# Altium PCB PCB1.PcbDoc
Units mm, origin at the board's own origin, x right, y up, seen from the top; angles counter-clockwise.
Board outline 152.4 x 101.6 mm, 2 copper layers (Top Layer, Bottom Layer); 89 components, 84 nets, 400 pads, 36 vias.
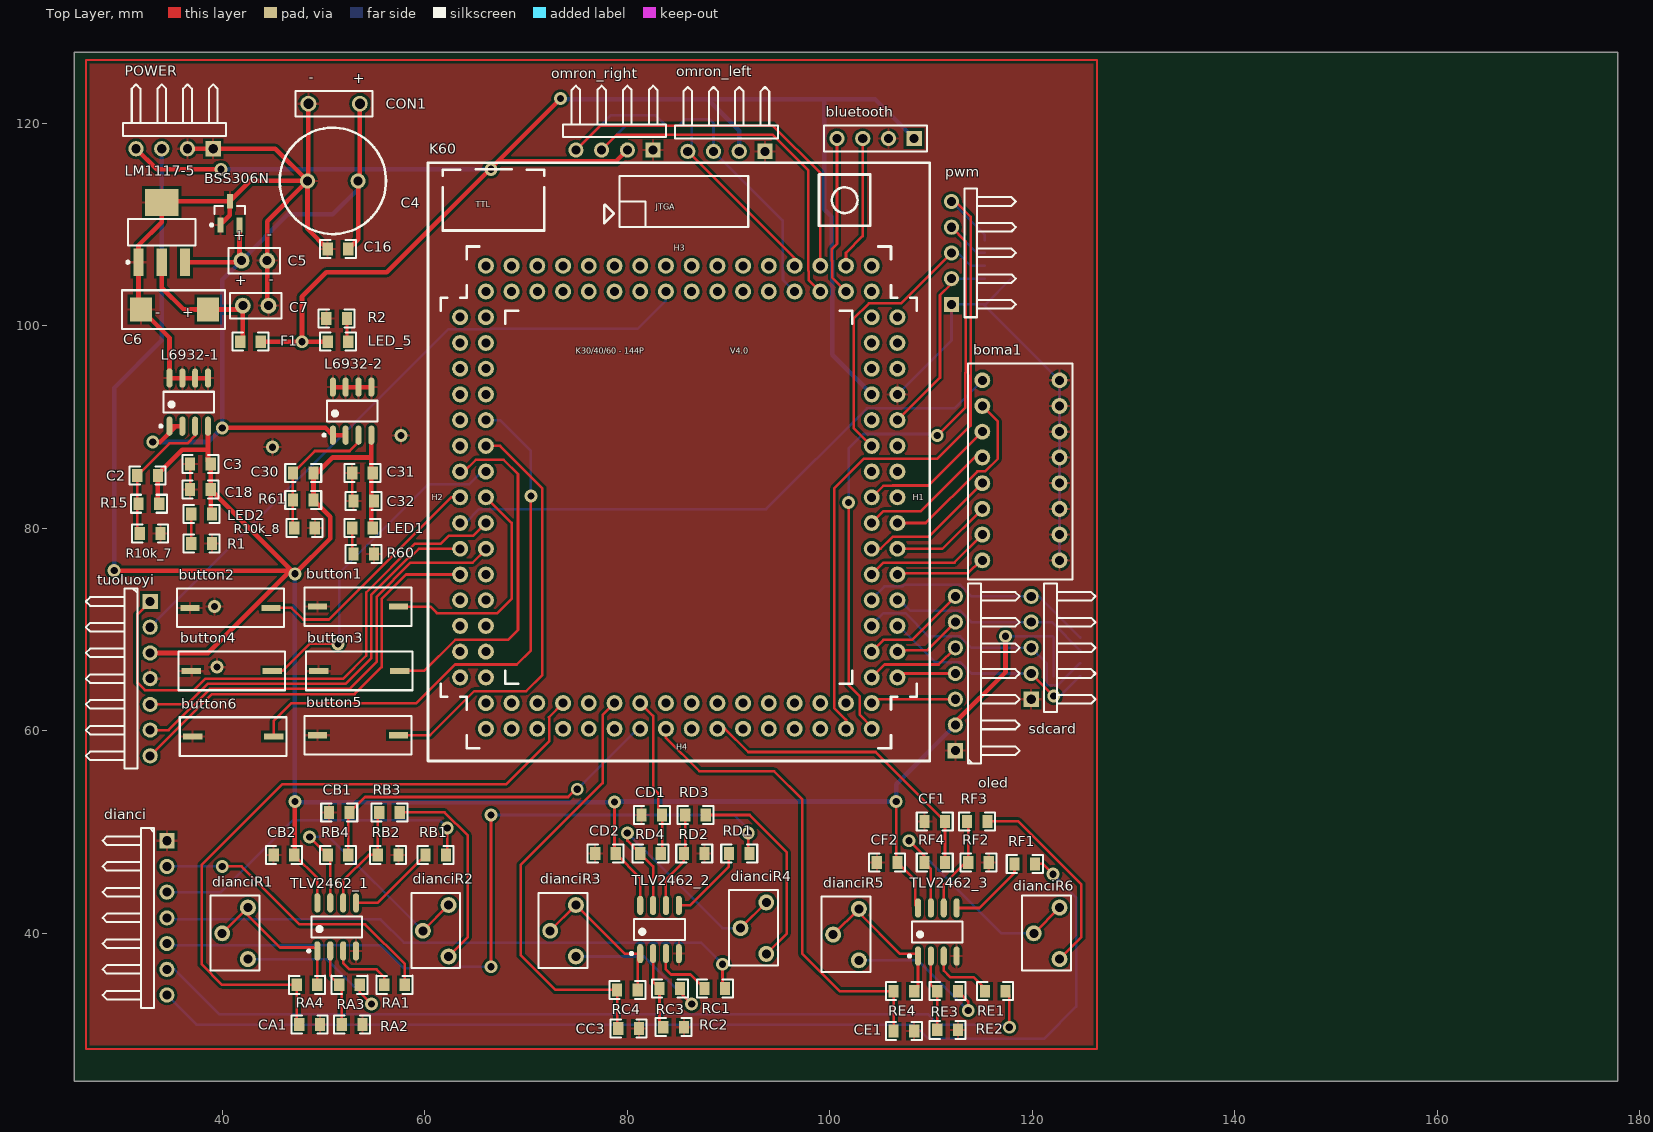
[diagram p0: Top Layer view]
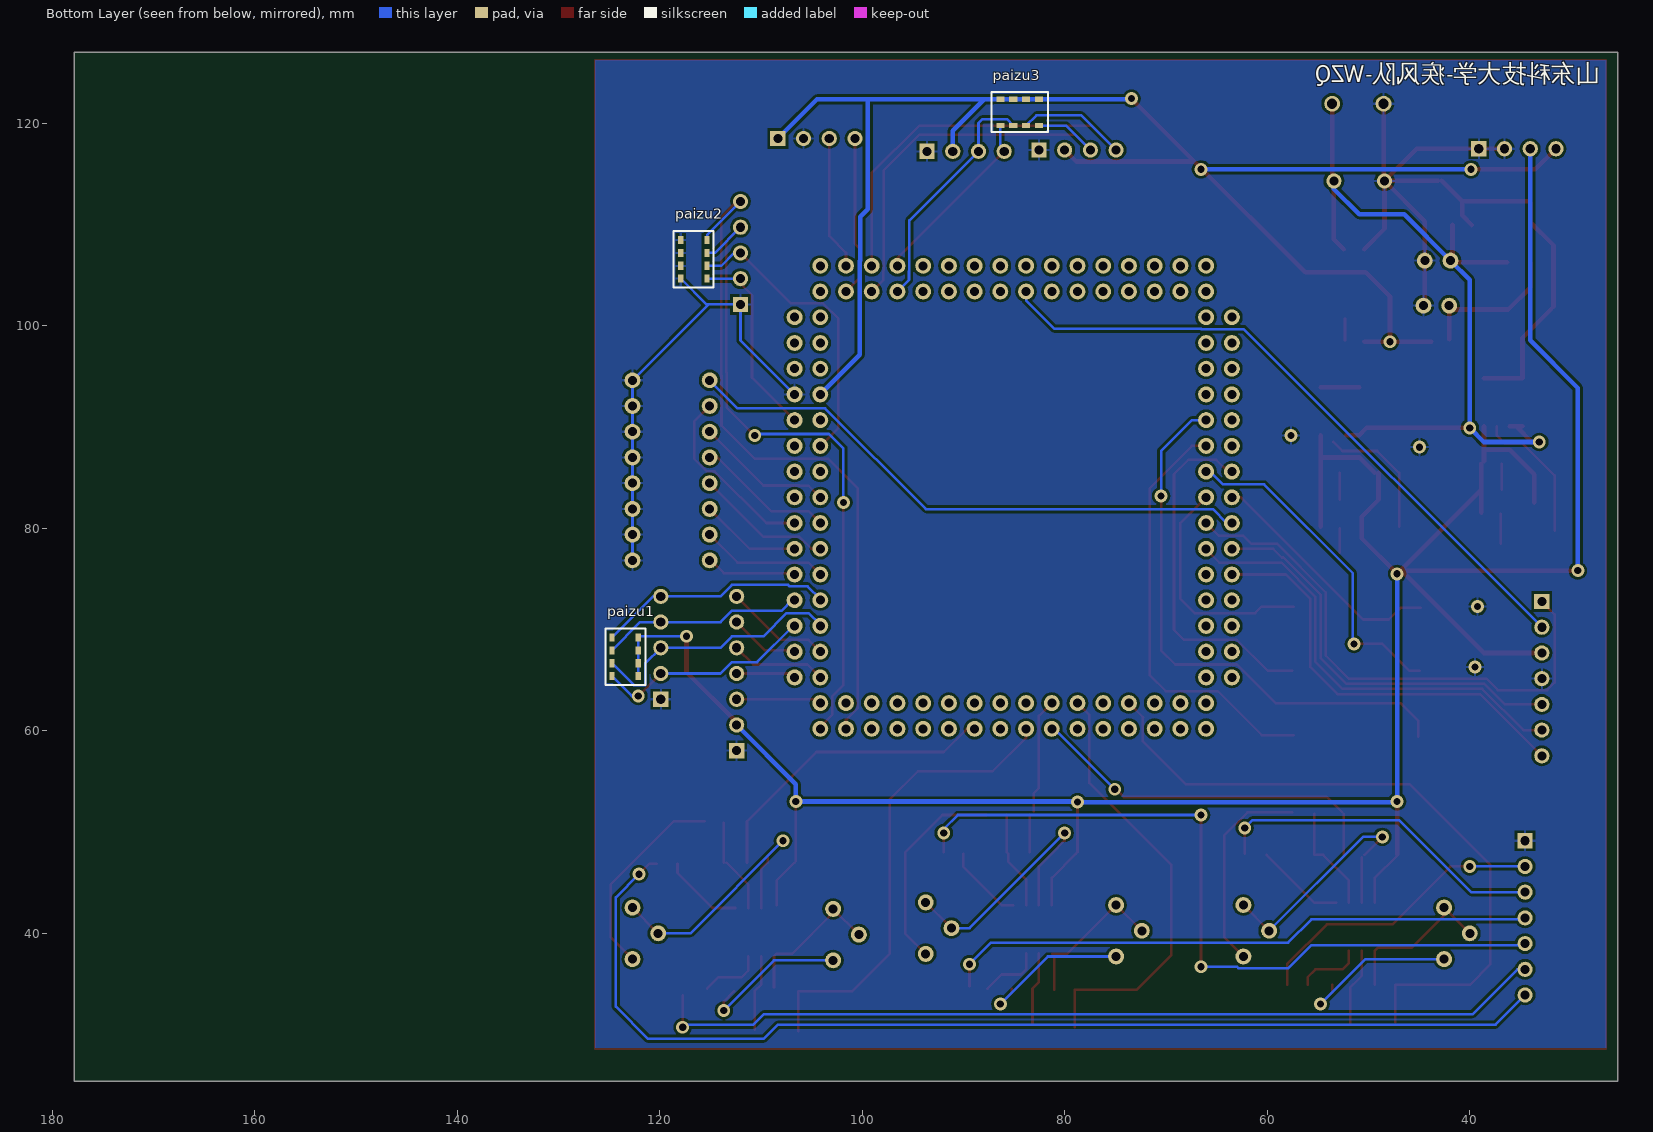
[diagram p1: Bottom Layer view, seen from below]

## Layer stack, top to bottom
Top Layer: signal copper 0.0356
Dielectric: dielectric 0.32, FR-4, Dk 4.8
Bottom Layer: signal copper 0.0356

## Board outline
25.4,25.4 177.8,25.4 177.8,127 25.4,127

## Design rules (kind name [scope] priority, off if disabled: settings)
Clearance [All] p1: gap=0.254
PolygonConnect [All] p1: connectstyle=Relief reliefconductorwidth=0.254 reliefentries=4 polygonreliefangle="90 Angle" airgapwidth=0.254
RoutingVias [All] p1: holewidth=0.711 width=1.27 viastyle="Through Hole" minholewidth=0.711 minwidth=1.27 maxholewidth=0.711 maxwidth=1.27
SolderMaskExpansion [All] p1: expansion=0.102
Width [All] p1: maxlimit=0.254 minlimit=0.254 preferedwidth=0.254
28 further rules are at their usual default settings.

## Components (designator, comment, footprint, x,y, rotation, side; value= is the part's Value field where it differs from the comment)
bluetooth "bluetooth" HDR1X4 108.331,118.491 r180 top
boma1 "boma_button" config_8 115.062,76.835 r90 top
BSS306N "MOSFET-N" SOT-23_M 40.767,111.125 r90 top
button1 "SW-PB" button 57.404,72.263 r180 top
button2 "SW-PB" button 44.831,72.136 r180 top
button3 "SW-PB" button 57.531,65.913 r180 top
button4 "SW-PB" button 44.958,65.913 r180 top
button5 "SW-PB" button 57.404,59.563 r180 top
button6 "SW-PB" button 45.085,59.436 r180 top
C2 "Cap" 0805 32.639,85.217 r0 top
C3 "Cap" 0805 37.846,86.36 r0 top
C4 "Cap Pol1" RB5-10.5 50.927,114.3 r180 top
C5 "Cap Pol1" 钽电容_小 44.45,106.426 r180 top
C6 "Cap Pol1" D7343 32.004,101.6 r0 top
C7 "Cap Pol1" 钽电容_小 44.577,101.981 r180 top
C16 "Cap" 0805 51.435,107.569 r0 top
C18 "Cap" 0805 37.846,83.82 r0 top
C30 "Cap" 0805 48.006,85.471 r0 top
C31 "Cap" 0805 53.848,85.471 r0 top
C32 "Cap" 0805 53.975,82.677 r0 top
CA1 "Cap" 0805 48.641,30.988 r180 top
CB1 "Cap" 0805 51.562,51.943 r0 top
CB2 "Cap" 0805 46.101,47.752 r180 top
CC3 "Cap" 0805 80.137,30.607 r180 top
CD1 "Cap" 0805 82.423,51.689 r0 top
CD2 "Cap" 0805 77.851,47.879 r180 top
CE1 "Cap" 0805 107.315,30.353 r180 top
CF1 "Cap" 0805 110.363,51.054 r0 top
CF2 "Cap" 0805 105.664,46.99 r180 top
CON1 "PowerIn" 接线端子 53.594,121.92 r180 top
dianci "interface_dianci" HDR1X7H 34.544,49.149 r270 top
dianciR1 "R4" 滑动变阻器 40.005,40.005 r90 top
dianciR2 "R4" 滑动变阻器 59.817,40.259 r90 top
dianciR3 "R4" 滑动变阻器 72.39,40.259 r90 top
dianciR4 "R4" 滑动变阻器 91.186,40.513 r90 top
dianciR5 "R4" 滑动变阻器 100.33,39.878 r90 top
dianciR6 "R4" 滑动变阻器 120.142,40.005 r90 top
F1 "Fuse 2" 0805 42.799,98.425 r0 top
K60 "K60" "K60 V4.0最小系统版" 85.09,83.185 r0 top
L6932-1 "L6932" L6932 36.703,92.456 r90 top
L6932-2 "L6932" L6932 52.832,91.567 r90 top
LED1 "LED2" 0805 53.848,80.01 r180 top (schematic designator LED_3.3_1)
LED2 "LED2" 0805 37.973,81.407 r180 top (schematic designator LED_3.3_2)
LED_5 "LED2" 0805 51.435,98.425 r0 top
LM1117-5 "LM1117-5" SOT223_M 34.036,109.22 r90 top
oled "oled" HDR1X7H 112.395,58.039 r90 top
omron_left "omron_encoder" HDR1X4H 93.599,117.221 r180 top
omron_right "omron_encoder" HDR1X4H 82.55,117.348 r180 top
paizu1 "paizu_1206" paizu 124.714,65.405 r90 bottom
paizu2 "paizu_1206" paizu 115.316,108.458 r270 bottom
paizu3 "paizu_1206" paizu 82.55,119.761 r0 bottom
POWER "power" HDR1X4H 39.116,117.475 r180 top
pwm "pwm" HDR1X5H 112.014,102.108 r90 top
R1 "Res2" 0805 37.973,78.486 r180 top
R2 "Res2" 0805 51.308,100.711 r0 top
R10k_7 "Res2" 0805 32.893,79.502 r180 top
R10k_8 "Res2" 0805 48.133,80.01 r180 top
R15 "Res2" 0805 32.766,82.423 r0 top
R60 "Res2" 0805 53.975,77.47 r180 top
R61 "Res2" 0805 48.006,82.804 r0 top
RA1 "Res2" 0805 57.023,34.925 r180 top
RA2 "Res2" 0805 52.832,30.988 r180 top
RA3 "Res2" 0805 52.578,34.925 r0 top
RA4 "Res2" 0805 48.387,34.925 r180 top
RB1 "Res2" 0805 61.087,47.752 r180 top
RB2 "Res2" 0805 56.388,47.752 r180 top
RB3 "Res2" 0805 56.515,51.943 r0 top
RB4 "Res2" 0805 51.435,47.752 r0 top
RC1 "Res2" 0805 88.646,34.544 r180 top
RC2 "Res2" 0805 84.582,30.734 r180 top
RC3 "Res2" 0805 84.201,34.544 r0 top
RC4 "Res2" 0805 80.01,34.417 r180 top
RD1 "Res2" 0805 91.059,47.879 r180 top
RD2 "Res2" 0805 86.614,47.879 r180 top
RD3 "Res2" 0805 86.741,51.689 r0 top
RD4 "Res2" 0805 82.296,47.879 r0 top
RE1 "Res2" 0805 116.332,34.29 r180 top
RE2 "Res2" 0805 111.633,30.48 r180 top
RE3 "Res2" 0805 111.633,34.29 r0 top
RE4 "Res2" 0805 107.315,34.29 r180 top
RF1 "Res2" 0805 119.253,46.863 r180 top
RF2 "Res2" 0805 114.681,46.99 r180 top
RF3 "Res2" 0805 114.554,51.054 r0 top
RF4 "Res2" 0805 110.363,46.99 r0 top
sdcard "interface_sdcard" HDR1X5H 119.888,63.119 r90 top (schematic designator interface_sdcard)
TLV2462_1 "TLV2462" SOP127P600X175-8L 51.308,40.64 r90 top
TLV2462_2 "TLV2462" SOP127P600X175-8L 83.185,40.386 r90 top
TLV2462_3 "TLV2462" SOP127P600X175-8L 110.617,40.132 r90 top
tuoluoyi "Component_sensor_tuoluoyi" HDR1X7H 32.893,72.771 r270 top

## Footprints (in the part's own frame and the unit in brackets; to place one, negate y for a bottom-side part, rotate by r counter-clockwise, add the part's x,y. Pads: shape width x height; smd on the part's side, far side on the other; paste and mask are expansions set on the pad)
0805 [mil]
  rect 40x50 smd: 1(-40,0) 2(40,0)
  silkscreen extent -70,-35 70,35
button [mm]
  rect 1.9x0.6 smd: 1(0,0) 2(8,0)
  silkscreen extent -1.27,-1.91 9.27,1.91
config_8 [mm]
  round 1.575 hole 0.889: 1(0,0) 2(0,-7.62) 3(2.54,0) 4(2.54,-7.62) 5(5.08,0) 6(5.08,-7.62) 7(7.62,0) 8(7.62,-7.62) 9(10.16,0) 10(10.16,-7.62) 11(12.7,0) 12(12.7,-7.62) 13(15.24,0) 14(15.24,-7.62) 15(17.78,0) 16(17.78,-7.62)
  silkscreen extent -1.91,-8.89 19.43,1.4
D7343 [mm]
  rect 2.16x2.41 smd: 1(0,0) 2(6.61,0)
  silkscreen extent -1.91,-1.91 8.25,1.91
HDR1X4 [mm] "Connector; Header; 4 Position"
  rect 1.5x1.5 hole 0.9: 1(0,0)
  round 1.5 hole 0.9: 2(2.54,0) 3(5.08,0) 4(7.62,0)
  silkscreen extent -1.27,-1.27 8.89,1.27
HDR1X4H [mm] "Connector; Header; 4 Position; Right Angle"
  rect 1.5x1.5 hole 0.9: 1(0,0)
  round 1.5 hole 0.9: 2(2.54,0) 3(5.08,0) 4(7.62,0)
  silkscreen extent -1.27,-6.35 8.89,-1.27
HDR1X5H [mm] "Connector; Header; 5 Position; Right Angle"
  rect 1.5x1.5 hole 0.9: 1(0,0)
  round 1.5 hole 0.9: 2(2.54,0) 3(5.08,0) 4(7.62,0) 5(10.16,0)
  silkscreen extent -1.27,-6.35 11.43,-1.27
HDR1X7H [mm] "Connector; Header; 7 Position; Right Angle"
  rect 1.5x1.5 hole 0.9: 1(0,0)
  round 1.5 hole 0.9: 2(2.54,0) 3(5.08,0) 4(7.62,0) 5(10.16,0) 6(12.7,0) 7(15.24,0)
  silkscreen extent -1.27,-6.35 16.51,-1.27
"K60 V4.0最小系统版" [mil]
  round 62 hole 35: 101(850,-705) 102(750,-705) 103(850,-605) 104(750,-605) 105(850,-505) 106(750,-505) 107(850,-405) 108(750,-405) 109(850,-305) 110(750,-305) 111(850,-205) 112(750,-205) 113(850,-105) 114(750,-105) 115(850,-5) 116(750,-5) 117(850,95) 118(750,95) 119(850,195) 120(750,195) 121(850,295) 122(750,295) 123(850,395) 124(750,395) 125(850,495) 126(750,495) 127(850,595) 128(750,595) 129(850,695) 130(750,695) 201(-750,-705) 202(-850,-705) 203(-750,-605) 204(-850,-605) 205(-750,-505) 206(-850,-505) 207(-750,-405) 208(-850,-405) 209(-750,-305) 210(-850,-305) 211(-750,-205) 212(-850,-205) 213(-750,-105) 214(-850,-105) 215(-750,-5) 216(-850,-5) 217(-750,95) 218(-850,95) 219(-750,195) 220(-850,195) 221(-750,295) 222(-850,295) 223(-750,395) 224(-850,395) 225(-750,495) 226(-850,495) 227(-750,595) 228(-850,595) 229(-750,695) 230(-850,695) 301(750,895) 302(750,795) 303(650,895) 304(650,795) 305(550,895) 306(550,795) 307(450,895) 308(450,795) 309(350,895) 310(350,795) 311(250,895) 312(250,795) 313(150,895) 314(150,795) 315(50,895) 316(50,795) 317(-50,895) 318(-50,795) 319(-150,895) 320(-150,795) 321(-250,895) 322(-250,795) 323(-350,895) 324(-350,795) 325(-450,895) 326(-450,795) 327(-550,895) 328(-550,795) 329(-650,895) 330(-650,795) 331(-750,895) 332(-750,795) 401(750,-805) 402(750,-905) 403(650,-805) 404(650,-905) 405(550,-805) 406(550,-905) 407(450,-805) 408(450,-905) 409(350,-805) 410(350,-905) 411(250,-805) 412(250,-905) 413(150,-805) 414(150,-905) 415(50,-805) 416(50,-905) 417(-50,-805) 418(-50,-905) 419(-150,-805) 420(-150,-905) 421(-250,-805) 422(-250,-905) 423(-350,-805) 424(-350,-905) 425(-450,-805) 426(-450,-905) 427(-550,-805) 428(-550,-905) 429(-650,-805) 430(-650,-905) 431(-750,-805) 432(-750,-905)
  silkscreen extent -975,-1030 975,1295
L6932 [mm] "SOP, 8-Leads, Body 4.90x3.90mm, Pitch 1.27mm, IPC High Density"
  oval 1.9x0.6 smd: 1(-2.375,1.905) 2(-2.375,0.635) 3(-2.375,-0.635) 4(-2.375,-1.905) 5(2.375,-1.905) 6(2.375,-0.635) 7(2.375,0.635) 8(2.375,1.905)
  silkscreen extent -2.5,-2.5 1.03,2.88, body extent -2,-2.5 2,2.5, height 1.75
paizu [mm]
  rect 0.8x0.5 smd: 1(0,0) 2(0,-2.6) 3(1.27,0) 4(1.27,-2.6) 5(2.54,0) 6(2.54,-2.6) 7(3.81,0) 8(3.81,-2.6)
  silkscreen extent -0.89,-3.3 4.7,0.64
RB5-10.5 [mm] "Capacitor (Radial); 2 Leads"
  round 1.5 hole 0.9: 1(-2.5,0) 2(2.5,0)
  silkscreen extent -5.25,-5.25 5.25,5.25
SOP127P600X175-8L [mm] "SOP, 8-Leads, Body 4.90x3.90mm, Pitch 1.27mm, IPC High Density"
  oval 1.9x0.6 smd: 1(-2.375,1.905) 2(-2.375,0.635) 3(-2.375,-0.635) 4(-2.375,-1.905) 5(2.375,-1.905) 6(2.375,-0.635) 7(2.375,0.635) 8(2.375,1.905)
  silkscreen extent -2.5,-2.5 1.03,2.88, body extent -2,-2.5 2,2.5, height 1.75
SOT223_M [mm] "SOT223, 4-Leads, Body 6.5x3.5mm, Pitch 2.3mm, Lead Span 7mm, IPC Low Density"
  rect 2.7x1 smd: 1(-2.95,2.3) 2(-2.95,0) 3(-2.95,-2.3)
  rect 2.7x3.3 smd: 4(2.95,0)
  silkscreen extent -3.07,-3.35 1.3,3.47, body extent -1.85,-3.35 1.85,3.35, height 1.7
SOT-23_M [mm] "SOT23, 3-Leads, Body 2.9x1.3mm, Pitch 0.95mm, Lead Span 2.5mm, IPC Low Density"
  rect 1.45x0.6 smd: 1(-1.175,0.95) 2(-1.175,-0.95) 3(1.175,0)
  silkscreen extent -1.3,-1.5 0.7,1.92, body extent -0.7,-1.5 0.7,1.5, height 1.1
接线端子 [mm]
  round 1.575 hole 1: 1(5.08,0) 2(0,0)
  silkscreen extent -1.27,-1.27 6.35,1.27
滑动变阻器 [mm]
  round 1.575 hole 0.889: 1(2.54,-2.54) 2(-2.54,-2.54) 3(0,0)
  silkscreen extent -3.68,-3.68 3.75,1.14
钽电容_小 [mil]
  round 62 hole 35: 1(0,0) 2(100,0)
  silkscreen extent -50,-50 150,50

## Part data
BSS306N: "N-Channel MOSFET"
button1 button2 button3 button4 button5 button6: "Switch"
C2 C3 C16 C18 C30 C31 C32 CA1 CB1 CB2 CC3 CD1 CD2 CE1 CF1 CF2: "Capacitor"
C4 C5 C6 C7: "Polarized Capacitor (Radial)"
CON1: library part "Header 2", "Header, 2-Pin"
dianciR1 dianciR2 dianciR3 dianciR4 dianciR5 dianciR6: library part RPot, "Potentiometer"
F1: "Fuse"
K60: library part Component_1
LED1 LED2 LED_5: "Typical RED, GREEN, YELLOW, AMBER GaAs LED"
R1 R2 R10k_7 R10k_8 R15 R60 R61 RA1 RA2 RA3 RA4 RB1 RB2 RB3 RB4 RC1 RC2 RC3 RC4 RD1 RD2 RD3 RD4 RE1 RE2 RE3 RE4 RF1 RF2 RF3 RF4: "Resistor"

## Via types
v1: diameter 1.27, hole 0.711, Top Layer to Bottom Layer, 36 vias

## Nets (pads, with @x,y where several pads share a name; then routed paths per layer and width w, separated by ;. In a path a pad name is that pad's centre, name@x,y a point inside that pad or via, vN(x,y) a via of type N, cw(c..) or ccw(c..) an arc to the next point about the centre after c; other vN are vias at no path point)
3.3V: C2.2 C3.2 C18.2 C30.2 C31.2 C32.2 CB2.1 CD2.1 CF2.1 L6932-1.4 L6932-2.4 LED1.1 LED2.1 oled.2 paizu1.2 paizu1.4 paizu1.6 paizu1.8 POWER.3 R15.2 R61.2 TLV2462_1.8 TLV2462_2.8 TLV2462_3.8 tuoluoyi.3 | length 278.7
  Top Layer w0.254: C2.2 C2.2@33.655,85.344 ; 43.5,72.583 43.5,72.594 ; 46.408,75.501 v1(47.18,75.501) ; CB2.1 49.403,45.466 TLV2462_1.8 ; C30.2 C30.2@49.403,85.471 ; CD2.1@78.74,48.006 v1(78.74,52.959) ; CD2.1 81.28,45.466 TLV2462_2.8 ; CF2.1@106.553,47.117 v1(106.553,53.023) ; CF2.1 108.458,45.212 TLV2462_3.8@108.458,42.761 ; oled.2 oled.2@112.395,60.833
  Top Layer w0.457: v1(29.337,75.819) v1@46.863,75.819 ; tuoluoyi.3 37.465,67.691 38.608,67.691 43.5,72.583 ; R15.2@33.655,82.55 C2.2 ; C2.2@33.655,85.344 36.068,87.757 38.608,87.757 ; C3.2@38.608,86.614 38.608,87.757 ; L6932-1.4 38.608,87.757 ; LED2.1@38.862,81.534 C18.2 ; C3.2 C18.2 ; 43.5,72.594 46.408,75.501 ; CB2.1@47.18,47.816 v1(47.18,53.023) ; C30.2 R61.2 50.673,81.153 50.673,78.994 v1(47.18,75.501) v1@46.863,75.819 ; C30.2@49.403,85.471 50.927,86.995 54.61,86.995 ; LED1.1@54.737,80.137 L6932-2.4 ; oled.2@112.395,60.833 117.348,65.786 v1(117.348,69.342) ; C18.2 v1@46.863,75.819
  Bottom Layer w0.254: v1(117.348,69.342) paizu1.8@121.987,69.342 ; paizu1.2 paizu1.4 paizu1.6 paizu1.8
  Bottom Layer w0.457: v1(29.337,75.819) 29.337,93.853 34.036,98.552 POWER.3 ; v1(47.18,53.023) v1(47.18,75.501) ; v1@47.244,52.959 v1(78.74,52.959) ; v1@78.74,53.023 v1(106.553,53.023) 106.553,54.737 oled.2
5V: bluetooth.1 F1.2 K60.124 LED_5.1 omron_left.2 omron_right.2 paizu3.2 paizu3.4 paizu3.6 paizu3.8 POWER.4 | length 167.3
  Top Layer w0.457: POWER.4 33.528,115.443 v1(39.878,115.443) ; F1.2 v1(47.879,98.425) ; LED_5.1 v1(47.879,98.425) ; v1(73.406,122.428) 67.195,116.217 ; 78.74,116.217 67.195,116.217 ; 78.879,116.217 omron_right.2 ; v1(47.879,98.425) 47.879,102.87 50.292,105.283 56.261,105.283 67.195,116.217
  Bottom Layer w0.457: v1@40.132,115.443 v1@66.421,115.443 ; v1@73.473,122.361 paizu3.2 paizu3.4 paizu3.6 paizu3.8 87.951,122.361 ; omron_left.2 91.059,119.253 87.951,122.361 ; 100.203,106.427 100.203,110.744 99.441,111.506 99.441,122.361 ; 100.228,106.402 100.228,97.13 K60.124 ; bluetooth.1 104.461,122.361 99.441,122.361 ; 87.951,122.361 99.441,122.361
  other v1: 66.548,115.443
AR1: K60.318 tuoluoyi.2 | length 65.2
  Bottom Layer w0.254: tuoluoyi.2 62.332,99.67 66.524,99.67 66.549,99.695 81.026,99.695 83.82,102.489 K60.318
AR2: K60.213 tuoluoyi.1 | length 53.7
  Top Layer w0.254: tuoluoyi.1 31.623,71.501 31.623,64.77 32.373,64.02 37.227,64.02 38.358,65.151 51.962,65.151 54.229,67.418 54.229,73.656 59.06,78.487 61.596,78.487 62.357,79.248 64.77,79.248 K60.213
BUTTON_BOMA1: boma1.1 K60.109 | length 9
  Top Layer w0.254: K60.109 106.807,75.565 113.665,75.565 114.935,76.835 boma1.1
BUTTON_BOMA2: boma1.3 K60.110 | length 12.5
  Top Layer w0.254: K60.110 105.308,76.606 112.331,76.606 ; 112.331,76.644 boma1.3
BUTTON_BOMA3: boma1.5 K60.111 | length 10
  Top Layer w0.254: K60.111 111.125,77.978 boma1.5
BUTTON_BOMA4: boma1.7 K60.112 | length 13.6
  Top Layer w0.254: K60.112 105.028,77.978 106.196,79.146 109.753,79.146 boma1.7
BUTTON_BOMA5: boma1.9 K60.114 | length 13.6
  Top Layer w0.254: K60.114 105.308,81.686 108.991,81.686 114.3,86.995 boma1.9
BUTTON_BOMA6: boma1.11 K60.116 | length 13.6
  Top Layer w0.254: K60.116 105.283,84.201 106.171,84.201 106.196,84.226 109.753,84.226 boma1.11
BUTTON_BOMA7: boma1.13 K60.113 | length 18.4
  Top Layer w0.254: K60.113 109.472,80.518 114.578,85.624 115.343,85.624 116.586,86.866 116.586,90.551 boma1.13
BUTTON_BOMA8: boma1.15 K60.214 | length 56.9
  Bottom Layer w0.254: K60.214@64.008,80.518 65.38,81.89 93.699,81.89 103.656,91.846 112.293,91.846 boma1.15
BUTTON_QINGCHU1: button1.1 K60.215 | length 23.1
  Top Layer w0.254: button1.1 60.579,72.263 61.214,71.628 67.183,71.628 68.58,73.025 68.58,80.518 K60.215
BUTTON_QINGCHU2: button2.1 K60.216 | length 23.3
  Top Layer w0.254: button2.1 46.863,72.136 48.006,70.993 50.546,70.993 62.611,83.058
BUTTON_QINGCHU3: button3.1 K60.218 | length 35.1
  Top Layer w0.254: button3.1 59.943,65.913 63.016,68.986 68.224,68.986 69.215,69.977 69.215,85.344 67.793,86.766 65.049,86.766 K60.218@63.881,85.598
BUTTON_QINGCHU4: button4.1 K60.217 | length 32.8
  Top Layer w0.254: button4.1 45.974,65.913 48.641,68.58 v1(51.435,68.58)
  Bottom Layer w0.254: v1@51.562,68.58 51.562,75.565 60.325,84.328 64.389,84.328 K60.217@65.659,85.598
BUTTON_QINGCHU5: button5.1 K60.219 | length 42.4
  Top Layer w0.254: button5.1 60.528,59.563 64.872,63.906 70.002,63.906 71.628,65.532 71.628,83.947 67.437,88.138 K60.219
BUTTON_QINGCHU6: button6.1 K60.221 | length 55.2
  Top Layer w0.254: button6.1 45.085,60.96 46.863,62.738 59.182,62.738 62.992,66.548 69.088,66.548 70.485,67.945 v1(70.485,83.185)
  Bottom Layer w0.254: K60.221 67.437,90.678 70.485,87.63 v1(70.485,83.185)
FTM1_QDPHA: K60.306 omron_right.3 paizu3.1 | length 41
  Top Layer w0.254: omron_right.3 78.994,118.872 94.361,118.872 97.892,115.341 97.892,105.409 97.917,105.383 97.917,104.521 K60.306
  Bottom Layer w0.254: omron_right.3 79.883,119.761 paizu3.1
FTM1_QDPHB: K60.305 omron_right.4 paizu3.3 | length 47
  Top Layer w0.254: omron_right.4 77.343,119.761 94.361,119.761 99.06,115.062 K60.305
  Bottom Layer w0.254: omron_right.4 78.359,120.777 82.804,120.777 paizu3.3
FTM2_QDPHA: K60.308 omron_left.3 paizu3.5 | length 23.8
  Bottom Layer w0.254: paizu3.5 85.725,120.396 88.138,120.396 88.519,120.015 omron_left.3 95.352,110.388 95.352,105.409 95.377,105.383 95.377,104.521 K60.308
FTM2_QDPHB: K60.307 omron_left.4 paizu3.7 | length 18.4
  Top Layer w0.254: omron_left.4 96.52,106.68 K60.307
  Bottom Layer w0.254: omron_left.4 86.36,117.602 paizu3.7
GND: bluetooth.2 boma1.2 boma1.4 boma1.6 boma1.8 boma1.10 boma1.12 boma1.14 boma1.16 BSS306N.1 BSS306N.3 button1.2 button2.2 button3.2 button4.2 button5.2 button6.2 C3.1 C4.2 C5.1 C6.1 C7.1 C16.1 C18.1 C31.1 C32.1 CA1.1 CB1.1 CB2.2 CC3.1 CD1.1 CD2.2 CE1.1 CF1.1 CF2.2 CON1.1 dianci.1 K60.123 L6932-1.5 L6932-1.6 L6932-1.7 L6932-1.8 L6932-2.5 L6932-2.6 L6932-2.7 L6932-2.8 LM1117-5.1 LM1117-5.4 oled.1 omron_left.1 omron_right.1 paizu2.2 paizu2.4 paizu2.6 paizu2.8 POWER.1 POWER.2 pwm.1 R1.1 R2.1 R10k_7.1 R10k_8.1 R60.1 RA2.1 RB2.1 RC2.1 RD2.1 RE2.1 RF2.1 sdcard.1 TLV2462_1.4 TLV2462_2.4 TLV2462_3.4 tuoluoyi.4 | length 138.7
  Top Layer w0.254: C6.1@31.736,101.868 C6.1 ; C18.1 C3.1 ; 42.767,114.3 43.148,114.3 ; C32.1@52.832,82.804 C31.1
  Top Layer w0.457: C6.1@31.736,101.868 LM1117-5.1 31.736,107.936 34.036,110.236 LM1117-5.4 ; C6.1 34.798,98.806 L6932-1.8 L6932-1.7 L6932-1.6 L6932-1.5 ; LM1117-5.4@34.166,112.3 BSS306N.3 ; POWER.2 POWER.1 45.252,117.475 C4.2 ; BSS306N.1 40.767,110.9 BSS306N.3 ; 42.767,114.3 BSS306N.3 ; 43.148,114.3 C4.2 ; C7.1@44.45,102.108 C5.1 44.45,110.323 C4.2 ; C4.2@48.514,114.387 CON1.1 ; C16.1 48.427,109.561 C4.2 ; L6932-2.8 L6932-2.7 L6932-2.6 L6932-2.5
  Bottom Layer w0.254: K60.123 112.014,98.552 pwm.1 115.189,102.108 ; paizu2.8 115.376,102.108 115.189,102.108 ; boma1.2 boma1.4 boma1.6 boma1.8 boma1.10 boma1.12 boma1.14 boma1.16 115.189,102.108
  other v1: 39.497,66.294 39.243,72.263 44.958,88.011 57.658,89.154
NetBSS306N_2: BSS306N.2 C4.1 C5.2 C16.2 CON1.2 L6932-1.1 L6932-1.2 L6932-2.1 L6932-2.2 LM1117-5.3 | length 80
  Top Layer w0.457: v1(33.147,88.519) 33.871,88.519 35.433,90.081 ; L6932-1.1 35.433,90.081 ; L6932-1.2 35.433,90.081 ; LM1117-5.3 C5.2@41.754,106.27 ; v1(40.005,89.916) 50.203,89.916 L6932-2.1 L6932-2.2 ; C5.2@41.717,106.619 BSS306N.2 ; C16.2 53.427,108.545 C4.1 ; C4.1@53.594,114.467 CON1.2
  Bottom Layer w0.254: 53.427,113.498 C4.1
  Bottom Layer w0.457: v1(33.147,88.519) 38.608,88.519 v1(40.005,89.916) 40.005,104.521 C5.2 46.482,110.998 50.927,110.998 53.427,113.498
NetC2_1: C2.1 L6932-1.3 R10k_7.2 R15.1 | length 13.7
  Top Layer w0.254: R10k_7.2@31.623,79.756 C2.1 34.798,88.392 36.576,88.392 37.338,89.154 L6932-1.3
NetC6_1: C6.2 C7.2 F1.1 LM1117-5.2 | length 14.3
  Top Layer w0.457: LM1117-5.2 34.036,103.759 36.195,101.6 C6.2 C7.2@41.656,101.6 ; F1.1@42.037,98.679 C7.2
NetC30_1: C30.1 L6932-2.3 R10k_8.2 R61.1 | length 13.1
  Top Layer w0.254: R10k_8.2@46.99,80.137 R61.1 C30.1 49.149,87.63 52.578,87.63 L6932-2.3@53.467,88.519
NetdianciR1_1: dianciR1.1 dianciR1.3 RA4.1 TLV2462_1.1 | length 16
  Top Layer w0.254: dianciR1.3 dianciR1.1 42.545,41.783 45.72,38.608 49.06,38.608 TLV2462_1.1 RA4.1
NetdianciR1_2: dianciR1.2 RA3.2 | length 16.4
  Top Layer w0.254: RA3.2 53.594,34.163 v1(54.737,33.02)
  Bottom Layer w0.254: dianciR1.2 50.292,37.465 v1(54.737,33.02)
NetdianciR2_1: dianciR2.1 dianciR2.3 RB4.1 TLV2462_1.7 | length 25.6
  Top Layer w0.254: v1(48.641,49.53) RB4.1 ; TLV2462_1.7 RB4.1@50.673,47.498 ; dianciR2.3 dianciR2.1
  Bottom Layer w0.254: v1(48.641,49.53) 50.546,49.53 dianciR2.3
NetdianciR2_2: dianciR2.2 RB3.2 | length 20.4
  Top Layer w0.254: RB3.2 61.976,51.943 64.262,49.657 64.262,39.624 dianciR2.2
NetdianciR3_1: dianciR3.1 dianciR3.3 RC4.1 TLV2462_2.1 | length 15.2
  Top Layer w0.254: dianciR3.3 dianciR3.1 79.756,37.973 TLV2462_2.1@81.242,37.973 ; RC4.1 TLV2462_2.1@81.026,37.757
NetdianciR3_2: dianciR3.2 RC3.2 | length 15.4
  Top Layer w0.254: RC3.2 85.217,34.163 v1(86.36,33.02)
  Bottom Layer w0.254: dianciR3.2 81.661,37.719 v1(86.36,33.02)
NetdianciR4_1: dianciR4.1 dianciR4.3 RD4.1 TLV2462_2.7 | length 26.9
  Top Layer w0.254: v1(80.01,49.911) 80.01,49.149 RD4.1 82.55,46.609 TLV2462_2.7 ; dianciR4.3 dianciR4.1
  Bottom Layer w0.254: v1(80.01,49.911) 89.408,40.513 dianciR4.3
NetdianciR4_2: dianciR4.2 RD3.2 | length 20.4
  Top Layer w0.254: RD3.2 92.075,51.689 95.758,48.006 95.758,40.005 dianciR4.2
NetdianciR5_1: dianciR5.1 dianciR5.3 RE4.1 TLV2462_3.1 | length 14.7
  Top Layer w0.254: dianciR5.3 dianciR5.1 102.87,42.037 106.934,37.973 108.496,37.973 TLV2462_3.1 RE4.1@108.712,34.671
NetdianciR5_2: dianciR5.2 RE3.2 | length 15.2
  Top Layer w0.254: RE3.2 113.665,33.274 v1(113.665,32.385)
  Bottom Layer w0.254: dianciR5.2 108.712,37.338 v1(113.665,32.385)
NetdianciR6_1: dianciR6.1 dianciR6.3 RF4.1 TLV2462_3.7 | length 27.2
  Top Layer w0.254: v1(107.823,49.149) 109.347,47.625 RF4.1 109.982,46.355 TLV2462_3.7 ; dianciR6.3 dianciR6.1
  Bottom Layer w0.254: v1(107.823,49.149) 116.967,40.005 dianciR6.3
NetdianciR6_2: dianciR6.2 RF3.2 | length 20.1
  Top Layer w0.254: RF3.2 118.618,51.054 124.841,44.831 124.841,39.624 dianciR6.2
NetLED_3.3_1_2: LED1.2 R60.2 | length 2.4
  Top Layer w0.254: R60.2@52.832,77.597 LED1.2
NetLED_3.3_2_2: LED2.2 R1.2 | length 2.9
  Top Layer w0.254: R1.2 LED2.2
NetLED_5_2: LED_5.2 R2.2 | length 2.2
  Top Layer w0.254: LED_5.2@52.324,98.552 R2.2
NetRA1_2: RA1.2 TLV2462_1.3 | length 6.6
  Top Layer w0.254: TLV2462_1.3 51.943,37.084 52.578,36.449 55.245,36.449 56.007,35.687 RA1.2
NetRA2_2: RA2.2 RA3.1 TLV2462_1.2 | length 7.8
  Top Layer w0.254: TLV2462_1.2 50.673,35.814 RA3.1 51.816,34.671 RA2.2
NetRB1_2: RB1.2 TLV2462_1.5 | length 8.8
  Top Layer w0.254: TLV2462_1.5 55.334,43.015 RB1.2
NetRB2_2: RB2.2 RB3.1 TLV2462_1.6 | length 10.7
  Top Layer w0.254: TLV2462_1.6 51.943,45.212 54.483,47.752 RB2.2 RB3.1@55.372,51.816
NetRC1_2: RC1.2 TLV2462_2.3 | length 6.2
  Top Layer w0.254: TLV2462_2.3 83.82,36.449 84.328,35.941 86.233,35.941 RC1.2
NetRC2_2: RC2.2 RC3.1 TLV2462_2.2 | length 7.2
  Top Layer w0.254: TLV2462_2.2 82.55,35.179 RC3.1 RC2.2@83.185,31.115
NetRD1_2: RD1.2 TLV2462_2.5 | length 7.8
  Top Layer w0.254: TLV2462_2.5 86.195,42.761 90.043,46.609 RD1.2
NetRD2_2: RD2.2 RD3.1 TLV2462_2.6 | length 9.5
  Top Layer w0.254: TLV2462_2.6 83.82,45.339 85.598,47.117 RD2.2 ; RD2.2@85.725,48.006 RD3.1
NetRE1_2: RE1.2 TLV2462_3.3 | length 6.2
  Top Layer w0.254: TLV2462_3.3 111.252,36.322 111.887,35.687 114.173,35.687 RE1.2@115.316,34.544
NetRE2_2: RE2.2 RE3.1 TLV2462_3.2 | length 7.5
  Top Layer w0.254: TLV2462_3.2 109.982,34.925 RE3.1 RE2.2
NetRF1_2: RF1.2 TLV2462_3.5 | length 8
  Top Layer w0.254: TLV2462_3.5 114.77,42.507 118.237,45.974 RF1.2
NetRF2_2: RF2.2 RF3.1 TLV2462_3.6 | length 9.3
  Top Layer w0.254: TLV2462_3.6 111.252,44.831 RF2.2@113.411,46.99 ; RF2.2 RF3.1@113.665,50.927
OLED_CS: K60.104 oled.7 | length 10.5
  Top Layer w0.254: K60.104 105.296,68.974 ; 105.283,68.986 108.102,68.986 oled.7
OLED_D0: K60.401 oled.3 | length 8.4
  Top Layer w0.254: K60.401 104.521,63.119 oled.3
OLED_D1: K60.101 oled.4 | length 5.3
  Top Layer w0.254: K60.101@107.061,65.659 oled.4
OLED_DS: K60.103 oled.6 | length 6.7
  Top Layer w0.254: K60.103@106.807,67.945 109.601,67.945 oled.6
OLED_RST: K60.102 oled.5 | length 9.5
  Top Layer w0.254: K60.102 105.41,66.548 110.744,66.548 oled.5
PWM_LEFT1: K60.404 paizu2.1 pwm.5 | length 68.2
  Top Layer w0.254: K60.404 101.6,61.086 100.432,62.254 100.432,83.922 103.378,86.868 110.617,86.868 113.893,90.144 113.893,95.125 113.919,95.15 113.919,110.744 pwm.5@112.395,112.268
  Bottom Layer w0.254: pwm.5 115.316,108.966 paizu2.1
PWM_LEFT2: K60.402 paizu2.3 pwm.4 | length 64.3
  Top Layer w0.254: v1(101.854,82.55) 101.854,64.516 102.972,63.398 102.972,61.57 K60.402@104.14,60.401 ; v1(110.617,89.154) 113.385,91.922 113.385,95.335 113.411,95.36 113.411,108.331 pwm.4
  Bottom Layer w0.254: v1@101.854,82.804 101.854,87.884 103.276,89.306 110.465,89.306 v1(110.617,89.154) ; pwm.4 114.554,107.188 paizu2.3
PWM_RIGHT1: K60.120 paizu2.5 pwm.3 | length 29.5
  Top Layer w0.254: K60.120 102.362,89.916 102.362,100.712 103.859,102.21 107.036,102.21 pwm.3
  Bottom Layer w0.254: pwm.3 112.649,107.188 113.919,105.918 paizu2.5
PWM_RIGHT2: K60.121 paizu2.7 pwm.2 | length 19.5
  Top Layer w0.254: K60.121 110.883,94.881 110.883,103.016 112.014,104.147 pwm.2
  Bottom Layer w0.254: pwm.2 paizu2.7
SDCARD_CLK: K60.106 paizu1.3 sdcard.3 | length 26.2
  Bottom Layer w0.254: K60.106@104.14,70.485 105.283,71.628 107.462,71.628 109.76,69.33 112.863,69.33 113.994,68.199 sdcard.3 121.412,66.675 121.412,64.516 122.555,64.516 paizu1.3
SDCARD_CS: K60.105 paizu1.1 sdcard.2 | length 21.6
  Top Layer w0.254: sdcard.2 v1(122.111,63.436)
  Bottom Layer w0.254: K60.105@106.807,70.358 110.375,66.79 112.863,66.79 113.994,65.659 sdcard.2 ; v1(122.111,63.436) 122.745,63.436 paizu1.1
SDCARD_MISO: K60.108 paizu1.7 sdcard.5 | length 23.3
  Bottom Layer w0.254: K60.108@104.14,73.025 105.385,74.27 107.164,74.27 107.304,74.41 112.863,74.41 113.994,73.279 sdcard.5 120.65,73.279 paizu1.7
SDCARD_MOSI: K60.107 paizu1.5 sdcard.4 | length 19.9
  Bottom Layer w0.254: K60.107@106.91,72.898 107.938,71.87 112.863,71.87 113.994,70.739 sdcard.4 121.92,70.739 paizu1.5
SIGNAL_IN_L1: dianci.2 RA1.1 | length 29.5
  Top Layer w0.254: v1(40.005,46.609) 41.91,46.609 47.625,40.894 54.102,40.894 58.039,36.957 RA1.1
  Bottom Layer w0.254: dianci.2 v1(40.005,46.609)
SIGNAL_IN_L2: dianci.3 RB1.1 | length 33.5
  Top Layer w0.254: RB1.1@62.23,47.879 v1(62.23,50.419)
  Bottom Layer w0.254: dianci.3 39.878,44.069 46.99,51.181 61.468,51.181 v1(62.23,50.419)
SIGNAL_IN_L3: dianci.4 RC1.1 | length 58.9
  Top Layer w0.254: RC1.1@89.408,34.798 v1(89.408,36.957)
  Bottom Layer w0.254: dianci.4 34.697,41.376 55.652,41.376 57.938,39.09 87.275,39.09 v1(89.408,36.957)
SIGNAL_IN_L4: dianci.5 RD1.1 | length 75.9
  Top Layer w0.254: v1(66.548,36.703) v1(66.548,51.689) ; RD1.1@91.948,48.006 v1(91.948,49.911)
  Bottom Layer w0.254: dianci.5 34.697,38.836 55.652,38.836 57.938,36.55 62.841,36.55 62.994,36.703 v1(66.548,36.703) ; v1(66.548,51.689) 90.551,51.689 v1@91.948,50.292
SIGNAL_IN_L5: dianci.6 RE1.1 | length 89
  Top Layer w0.254: dianci.6 dianci.6@34.925,36.449 ; v1(117.729,30.734) RE1.1@117.729,33.909
  Bottom Layer w0.254: dianci.6 35.306,36.449 39.751,32.004 109.728,32.004 110.744,30.988 v1@117.729,30.988
SIGNAL_IN_L6: dianci.7 RF1.1 | length 109.1
  Top Layer w0.254: RF1.1 121.031,46.863 v1(122.047,45.847)
  Bottom Layer w0.254: dianci.7 37.465,30.988 108.331,30.988 109.728,29.591 121.158,29.591 124.333,32.766 124.333,43.561 v1(122.047,45.847)
SIGNAL_OUT_L1: CA1.2 K60.425 RA4.2 | length 67.4
  Top Layer w0.254: CA1.2@47.371,31.242 RA4.2 40.005,34.925 37.973,36.957 37.973,46.736 45.974,54.737 68.072,54.737 72.288,58.953 72.288,61.341 ; 72.263,61.341 K60.425
SIGNAL_OUT_L2: CB1.2 K60.420 RB4.2 | length 35.6
  Top Layer w0.254: RB4.2 CB1.2@52.451,51.816 ; CB1.2 54.102,53.467 74.168,53.467 v1@74.803,54.102
  Bottom Layer w0.254: v1(75.057,54.229) K60.420@81.026,60.198
SIGNAL_OUT_L3: CC3.2 K60.421 RC4.2 | length 43.5
  Top Layer w0.254: 77.572,60.834 77.572,54.839 69.469,46.736 69.469,37.846 72.898,34.417 RC4.2 CC3.2@78.994,30.734 ; 77.597,60.731 77.597,61.595 K60.421
SIGNAL_OUT_L4: CD1.2 K60.419 RD4.2 | length 15.1
  Top Layer w0.254: K60.419 82.55,61.468 82.55,54.356 83.058,53.848 CD1.2@83.058,52.07 ; RD4.2@83.439,48.006 CD1.2
SIGNAL_OUT_L5: CE1.2 K60.418 RE4.2 | length 46.6
  Top Layer w0.254: K60.418 83.82,59.309 87.122,56.007 94.488,56.007 97.282,53.213 97.282,37.973 100.965,34.29 RE4.2 CE1.2
SIGNAL_OUT_L6: CF1.2 K60.414 RF4.2 | length 30.3
  Top Layer w0.254: K60.414 89.662,60.198 91.948,57.912 104.521,57.912 CF1.2 RF4.2
UART_RX: bluetooth.3 K60.303 | length 13.3
  Top Layer w0.254: K60.303 101.6,107.188 103.251,108.839 bluetooth.3
UART_TX: bluetooth.4 K60.304 | length 15.9
  Top Layer w0.254: bluetooth.4 100.711,108.077 100.203,107.569 100.203,106.427 100.228,106.402 100.228,104.75 K60.304
XOUT: K60.210 tuoluoyi.7 | length 42
  Top Layer w0.254: tuoluoyi.7 38.989,63.627 53.086,63.627 55.753,66.294 55.753,73.025 58.166,75.438 K60.210
YOUT: K60.211 tuoluoyi.6 | length 44.3
  Top Layer w0.254: tuoluoyi.6 34.715,60.071 38.779,64.135 52.578,64.135 55.245,66.802 55.245,73.235 58.616,76.606 64.745,76.606 K60.211@66.04,77.902
ZOUT: K60.212 tuoluoyi.5 | length 40.6
  Top Layer w0.254: tuoluoyi.5 36.536,62.611 38.568,64.643 52.197,64.643 54.737,67.183 54.737,73.446 58.406,77.114 58.572,77.114 59.436,77.978 K60.212
pads on no net: K60.115 K60.117 K60.118 K60.119 K60.122 K60.125 K60.126 K60.127 K60.128 K60.129 K60.130 K60.201 K60.202 K60.203 K60.204 K60.205 K60.206 K60.207 K60.208 K60.209 K60.220 K60.222 K60.223 K60.224 K60.225 K60.226 K60.227 K60.228 K60.229 K60.230 K60.301 K60.302 K60.309 K60.310 K60.311 K60.312 K60.313 K60.314 K60.315 K60.316 K60.317 K60.319 K60.320 K60.321 K60.322 K60.323 K60.324 K60.325 K60.326 K60.327 K60.328 K60.329 K60.330 K60.331 K60.332 K60.403 K60.405 K60.406 K60.407 K60.408 K60.409 K60.410 K60.411 K60.412 K60.413 K60.415 K60.416 K60.417 K60.422 K60.423 K60.424 K60.426 K60.427 K60.428 K60.429 K60.430 K60.431 K60.432
copper on no net: | length 395
  Top Layer w0.2: 26.543,28.575 26.543,126.238 126.365,126.238 126.365,28.575 26.543,28.575

## Polygon pours and split planes (outlines as drawn)
GND on Top Layer "Bottom Layer-No Net" (solid, remove dead copper, pour order 6): 26.543,126.238 126.365,126.238 126.365,28.575 26.543,28.575 26.543,126.238
GND on Bottom Layer "Bottom Layer-No Net" (solid, remove dead copper, pour order 8): 26.543,126.238 126.365,126.238 126.365,28.702 26.543,28.702 26.543,126.238

## Silkscreen, mask and mechanical layers (free items; w line width, h text height)
Bottom Overlay:
  text "山东科技大学-疾风队-WZQ" at 27.178,123.444 h3

## Text inside footprints (layer, text, board x,y; h text height)
C5: Top Overlay "-" at 44.958,109.347 h1.02 r180; Top Overlay "+" at 42.291,109.347 h1.02 r180
C6: Top Overlay "-" at 33.401,100.838 h1.02; Top Overlay "+" at 36.068,100.838 h1.02
C7: Top Overlay "-" at 45.085,104.902 h1.02 r180; Top Overlay "+" at 42.418,104.902 h1.02 r180
CON1: Top Overlay "+" at 54.102,124.841 h1.02 r180; Top Overlay "-" at 49.022,124.841 h1.02 r180
K60: Top Overlay "K30/40/60 - 144P" at 74.93,97.028 h1.02; Top Overlay "JTGA" at 82.804,111.252 h1.02; Top Overlay "H1" at 108.204,82.55 h1.02; Top Overlay "H4" at 84.836,57.912 h1.02; Top Overlay "H2" at 60.706,82.55 h1.02; Top Overlay "H3" at 84.582,107.188 h1.02; Top Overlay "TTL" at 65.024,111.506 h1.02; Top Overlay "V4.0" at 90.17,97.028 h1.02